# Altium PCB Smart Motor Switch.PcbDoc
Units mil, origin at the board's own origin, x right, y up, seen from the top; angles counter-clockwise.
Board outline 2795 x 1910 mil, 4 copper layers (Top Layer, Signal Layer 1, Mid-2, Bottom Layer), stack 30.634 mil thick; 53 components, 33 nets, 256 pads, 81 vias.
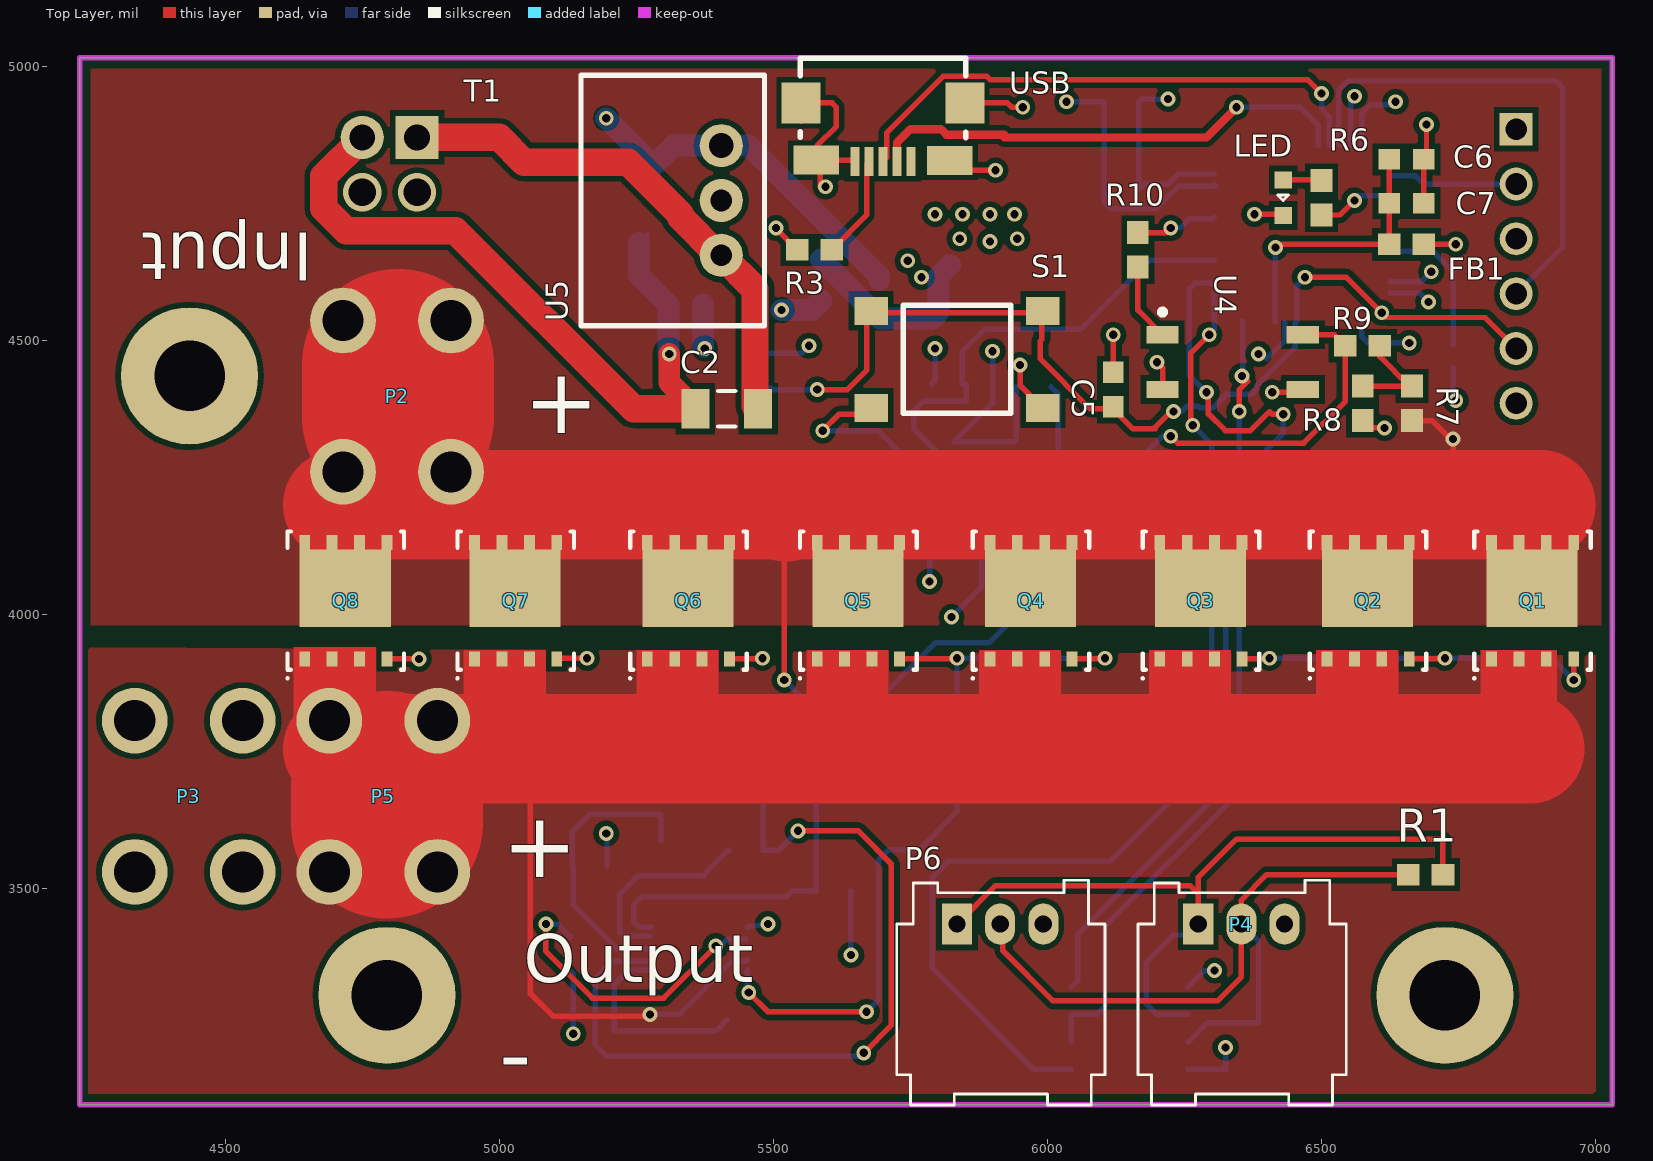
[diagram p0: Top Layer view]
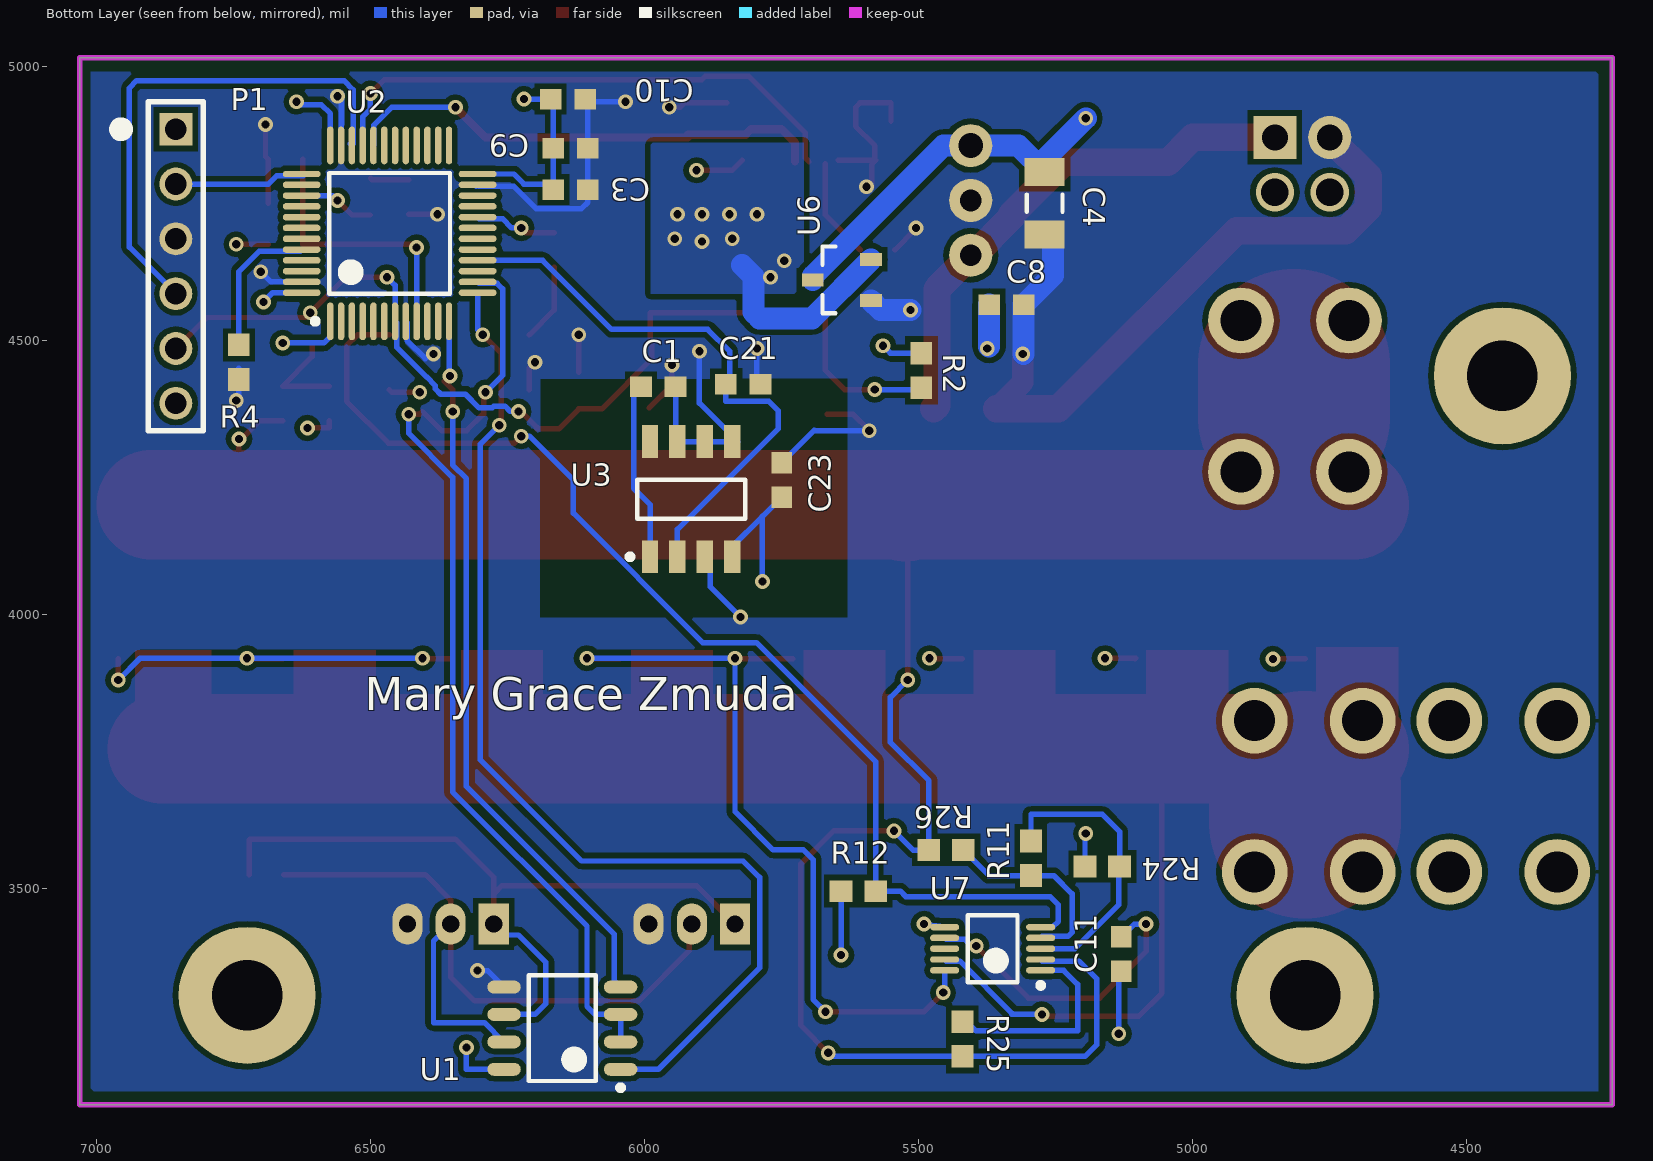
[diagram p1: Bottom Layer view, seen from below]
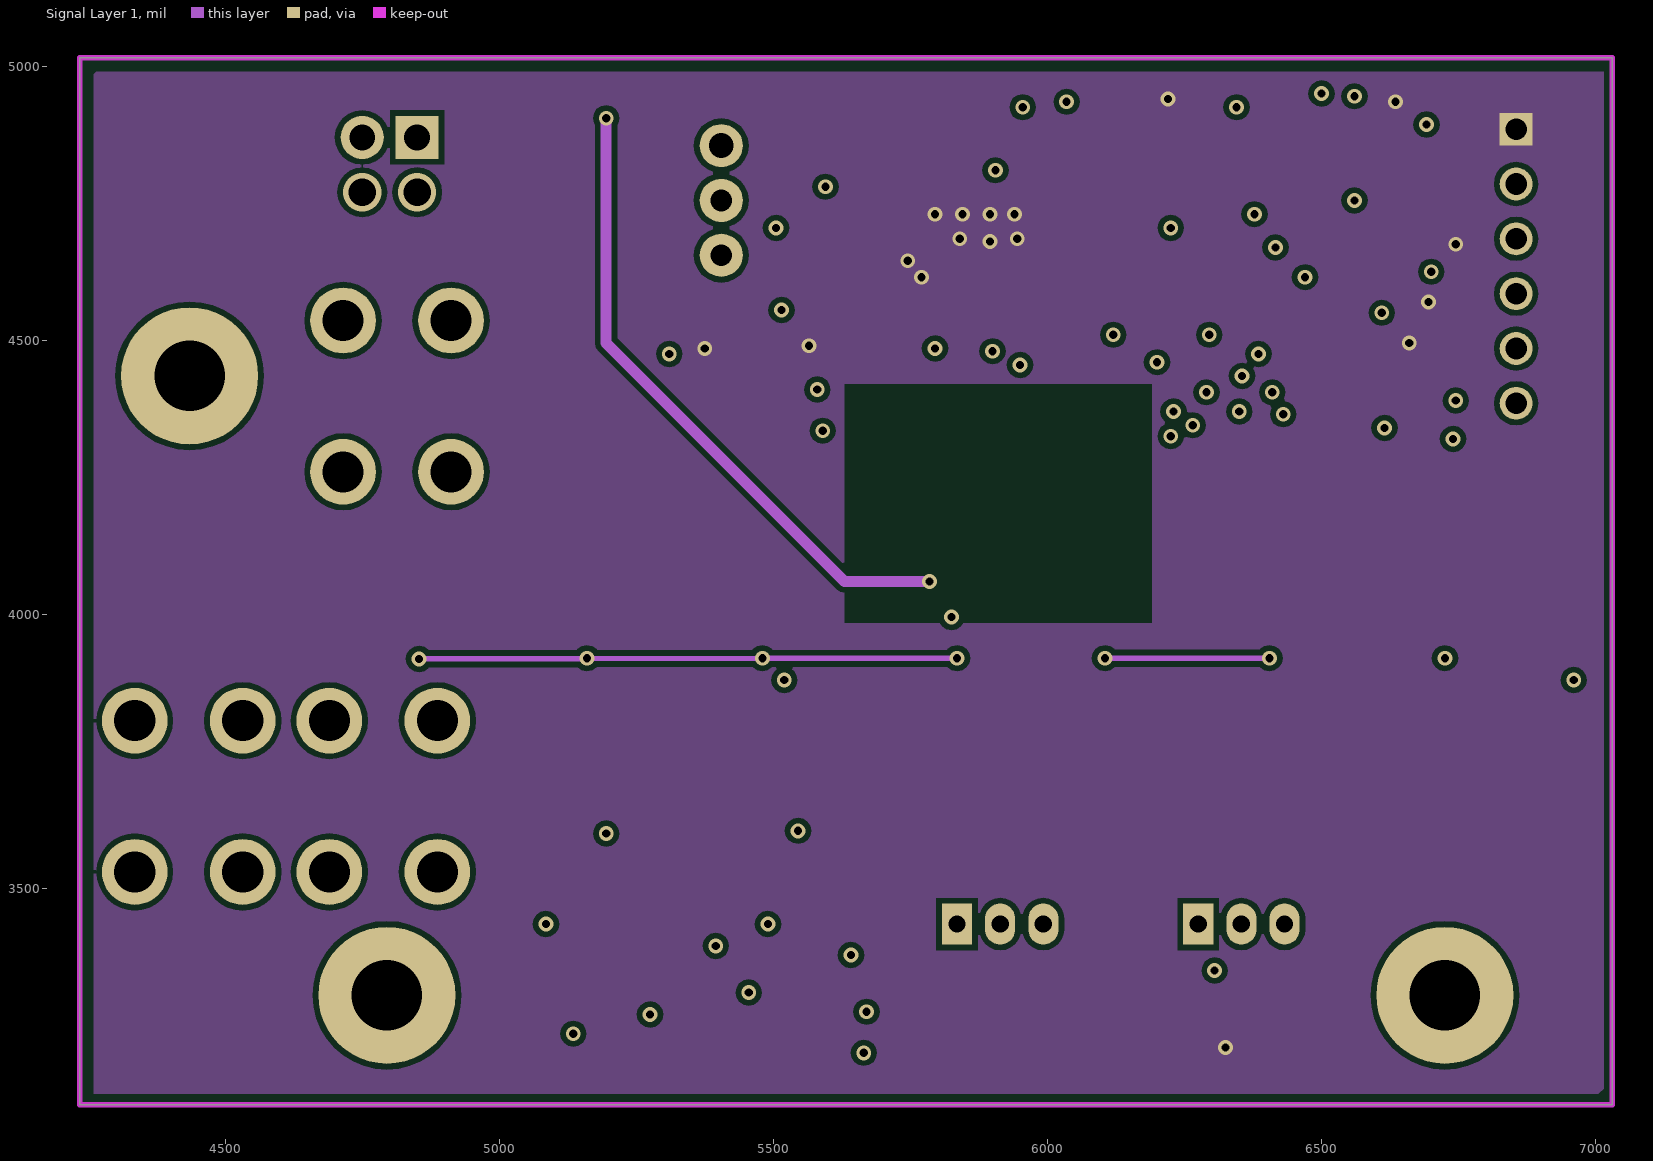
[diagram p2: Signal Layer 1]
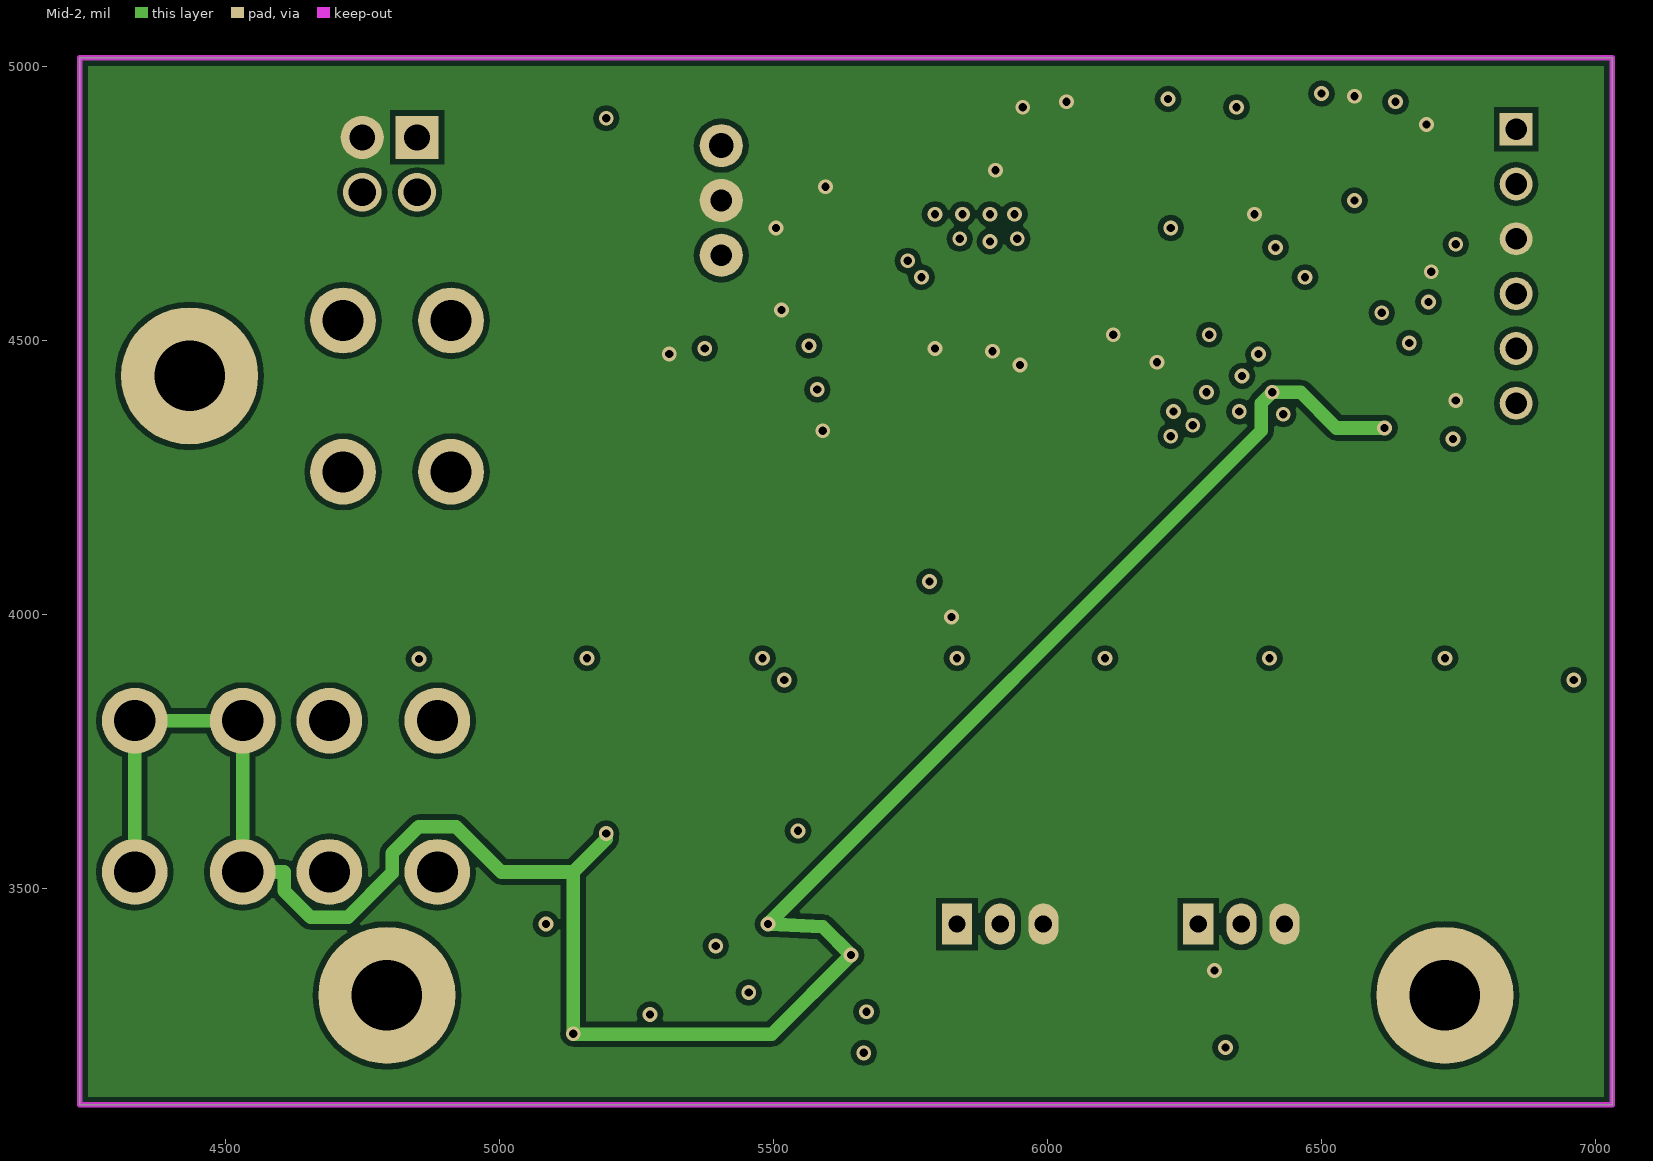
[diagram p3: Mid-2]

## Layer stack, top to bottom
Top Solder: solder mask 0.4, Solder Resist, Dk 3.5
Top Layer: signal copper 1.4
Dielectric 1: core 10, FR-4, Dk 4.2
Signal Layer 1: signal copper 1.417
Dielectric 3: prepreg 5, Dk 4.2
Mid-2: signal copper 1.417
Dielectric 2: core 10, Dk 4.2
Bottom Layer: signal copper 1.4
Bottom Solder: solder mask 0.4, Solder Resist, Dk 3.5

## Board outline
4235,3105 7030,3105 7030,5015 4235,5015

## Design rules (kind name [scope] priority, off if disabled: settings)
Clearance [All] p1: gap=10 except(6: Track-Track Track-SMDPad SMDPad-SMDPad)
DiffPairsRouting [All] p1: maxlimit=10 minlimit=10 mostfreqgap=10 toplayer_minwidth=10 toplayer_maxwidth=15 toplayer_prefwidth=10 midlayer1_minwidth=10 midlayer1_maxwidth=15 midlayer1_prefwidth=10 midlayer2_minwidth=10 midlayer2_maxwidth=15 midlayer2_prefwidth=10 bottomlayer_minwidth=10 bottomlayer_maxwidth=15 bottomlayer_prefwidth=10 maxuncoupledlength=500
HoleSize [All] p1: absolutevalues=TRUE maxlimit=150 minlimit=1 maxpercent=80.000 minpercent=20.000
MinimumSolderMaskSliver [All] p1: minsoldermaskwidth=1
PolygonConnect [All] p1: connectstyle=Direct reliefconductorwidth=10 reliefentries=4 polygonreliefangle="90 Angle" airgapwidth=10
RoutingVias [All] p1: holewidth=28 width=50 viastyle="Through Hole" minholewidth=28 minwidth=50 maxholewidth=28 maxwidth=50
SilkToSolderMaskClearance [IsPad] p1: minsilkscreentomaskgap=2 clearancetoexposedcopper=TRUE
SolderMaskExpansion [All] p1: expansion=4
Width [All] p1: maxlimit=350 minlimit=10 preferedwidth=10
26 further rules are at their usual default settings.

## Classes and differential pairs
component class CPU: C1 C3 C5 C6 C7 C9 C10 C11 C21 C23 FB1 LED P1 P2 P3 P4 P5 P6 Q1 Q2 Q3 Q4 Q5 Q6 Q7 Q8 R1 R2 R3 R4 R6 R7 R8 R9 R10 R11 R12 R24 R25 R26 S1 T1 U1 U2 U3 U4 U7 USB
component class power: C2 C4 C8 U5 U6
differential pair USB: +USB_P -USB_N

## Components (designator, comment, footprint, x,y, rotation, side; value= is the part's Value field where it differs from the comment)
C1 "Cap" CAPC0603 5975,4415 r0 bottom
C2 "Cap" CAPC1206 5415,4375 r180 top
C3 "Cap" CAPC0603 6135,4775 r180 bottom
C4 "Cap" CAPC1206 5270,4750 r270 bottom
C5 "Cap" CAPC0603 6120,4410 r90 top
C6 "Cap" CAPC0603 6655,4830 r0 top
C7 "Cap" CAPC0603 6655,4750 r0 top
C8 "Cap" CAPC0603 5340,4565 r180 bottom
C9 "Cap" CAPC0603 6135,4850 r180 bottom
C10 "Cap" CAPC0603 6140,4940 r180 bottom
C11 "Cap" CAPC0603 5130,3380 r270 bottom
C21 "Cap" CAPC0603 5820,4420 r180 bottom
C23 "Cap" CAPC0603 5750,4245 r90 bottom
FB1 "FBead" RES0603 6655,4675 r0 top
LED "LED" LED0603 6430,4760 r270 top
P1 "SWD" SWD_STM32 6855,4885 r180 bottom
P2 "SCREW TERM VERT PCMNT" "SCREW TERM SINGLE VERT" 4715,4260 r0 top
P3 "SCREW TERM VERT PCMNT" "SCREW TERM SINGLE VERT" 4335,3530 r0 top
P4 "3pos RA sherlock connector" MOLEX-HDR-1X3-SHERLOCK-RA 6275,3435 r180 top
P5 "SCREW TERM VERT PCMNT" "SCREW TERM SINGLE VERT" 4690,3530 r0 top
P6 "3pos RA sherlock connector" MOLEX-HDR-1X3-SHERLOCK-RA 5835,3435 r180 top
Q1 "CSD19502Q5B" CSD19502Q5B 6885,4025 r90 top
Q2 "CSD19502Q5B" CSD19502Q5B 6585,4025 r90 top
Q3 "CSD19502Q5B" CSD19502Q5B 6280,4025 r90 top
Q4 "CSD19502Q5B" CSD19502Q5B 5970,4025 r90 top
Q5 "CSD19502Q5B" CSD19502Q5B 5655,4025 r90 top
Q6 "CSD19502Q5B" CSD19502Q5B 5345,4025 r90 top
Q7 "CSD19502Q5B" CSD19502Q5B 5030,4025 r90 top
Q8 "CSD19502Q5B" CSD19502Q5B 4720,4025 r90 top
R1 "Res" RES0603 6690,3525 r0 top
R2 "Res" RES0603 5495,4445 r270 bottom
R3 "Res" RES0603 5575,4665 r180 top
R4 "Res" RES0603 6740,4460 r90 bottom
R6 "Res" RES0603 6500,4760 r90 top
R7 "Res" RES0603 6665,4385 r90 top
R8 "Res" RES0603 6575,4385 r270 top
R9 "Res" RES0603 6575,4490 r180 top
R10 "Res" RES0603 6165,4665 r270 top
R11 "Res" RES0603 5295,3555 r90 bottom
R12 "Res" RES0603 5610,3495 r180 bottom
R24 "Res" RES0603 5165,3540 r0 bottom
R25 "Res" RES0603 5420,3225 r90 bottom
R26 "Res" RES0603 5450,3570 r180 bottom
S1 "Button" PTS645xxxxSMTR92 5835,4465 r180 top
T1 "1725656" 1725656 4850,4870 r270 top
U1 "SP3485" SP3485 6150,3245 r0 bottom
U2 "STM32F072CB" STM32F072CB 6465,4695 r90 bottom
U3 "FHS 40-P/SP600" "FHS 40-P/SP600" 5915,4210 r90 bottom
U4 "LTV-356T" LTV-356T 6210,4510 r270 top
U5 "R-78C5.0-1.0" R-78C5.0-1.0 5405,4655 r90 top
U6 "MCP1703AT" MCP1703AT-xx02EDB 5640,4610 r0 bottom
U7 "LM5060" LM5060 5365,3390 r0 bottom
USB "USB Micro" 10118192-0001LF 5700,4805 r180 top

## Footprints (in the part's own frame and the unit in brackets; to place one, negate y for a bottom-side part, rotate by r counter-clockwise, add the part's x,y. Pads: shape width x height; smd on the part's side, far side on the other; paste and mask are expansions set on the pad)
1725656 [mm] "CONN TERM BLOCK 2.54MM 2POS"
  rect 2x2 hole 1.2: 1(0,0)
  round 2 hole 1.2: 2(0,-2.54)
10118192-0001LF [mm] "USB Micro-B Recepticle"
  rect 0.4x1.35 smd: 1(-1.3,-0.533) 2(-0.65,-0.533) 3(0,-0.533) 4(0.65,-0.533) 5(1.3,-0.533)
  rect 1.8x1.9 smd: SHD(-3.8,-3.248) SHD(3.8,-3.248)
  rect 2.1x1.35 smd: SHD(-3.1,-0.584) SHD(3.1,-0.598)
  silkscreen extent -3.83,-5.33 3.83,-1.63, body extent -3.96,-5.98 3.96,-0.32, height 3.09
CAPC0603 [mm] "Chip Capacitor, 2-Leads, Body 1.60x0.80mm, IPC Medium Density"
  rect 1x0.95 smd: 1(-0.8,0) 2(0.8,0)
  body extent -0.88,-0.48 0.87,0.48, height 0.8
CAPC1206 [mm] "Chip Capacitor, 2-Leads, Body 3.20x1.60mm, IPC Medium Density"
  rect 1.3x1.85 smd: 1(-1.45,0) 2(1.45,0)
  silkscreen extent -0.4,-0.82 0.4,0.82, body extent -1.7,-0.9 1.7,0.9, height 1.8
CSD19502Q5B [mm] "PSON, 8-Leads, Body 5.00x6.00mm, Pitch 1.27mm, Thermal Pad 4.22x3.58mm, IPC Medium Density"
  rect 3.58x4.22 smd paste-1.79 mask+0: D(0.575,0.025)
  rect 0.7x0.5 smd mask+0: D(2.7,-1.905) D(2.7,-0.635) D(2.7,0.635) D(2.7,1.905) G(-2.7,-1.905) S(-2.7,-0.635) S(-2.7,0.635) S(-2.7,1.905)
  silkscreen extent -3.65,-2.7 3.2,2.75, body extent -3.05,-2.55 3.05,2.55, height 1.05
"FHS 40-P/SP600" [mm] "SENSOR CURRENT 100A 5V BI 8SOIC"
  rect 1.52x0.76 smd: 1(-2.67,1.905) 2(-2.67,0.635) 3(-2.67,-0.635) 4(-2.67,-1.905) 5(2.67,-1.905) 6(2.67,-0.635) 7(2.67,0.635) 8(2.67,1.905)
  silkscreen extent -2.79,-2.5 0.9,2.96, body extent -2,-2.5 2,2.5, height 1.72
LED0603 [mm] "Chip LED, 2-Leads, Body 1.60x0.80mm, IPC Medium Density"
  rect 0.8x0.8 smd: A(-0.825,0) C(0.825,0)
  silkscreen extent -0.13,-0.25 0.12,0.25, body extent -0.88,-0.48 0.87,0.47, height 0.8
LM5060 [mm] "10-VSSOP"
  oval 1.35x0.3 smd: 1(-2.225,1) 2(-2.225,0.5) 3(-2.225,0) 4(-2.225,-0.5) 5(-2.225,-1) 6(2.225,-1) 7(2.225,-0.5) 8(2.225,0) 9(2.225,0.5) 10(2.225,1)
  silkscreen extent -2.35,-1.55 1.15,1.82, body extent -1.55,-1.55 1.55,1.55, height 1.1
LTV-356T [mm] "OPTOISOLATOR 3.75KV TRANS 4-SOP"
  rect 0.8x1.5 smd: 1(0,0) 2(2.54,0) 3(2.54,6.5) 4(0,6.5)
  silkscreen extent -1.17,-0.12 -0.93,0.13
MCP1703AT-xx02EDB [mm] "SOT23, 3-Leads, Body 2.90x2.55mm, Pitch 0.95mm, IPC Medium Density"
  rect 1x0.6 smd: 1(-1.35,0.95) 2(-1.35,-0.95) 3(1.35,0)
  silkscreen extent 0.3,-1.55 0.9,1.55, body extent -0.9,-1.55 0.9,1.55, height 1.45
MOLEX-HDR-1X3-SHERLOCK-RA [mm]
  rect 1.397x1.905 hole 0.8: 1(0,0)
  oval 1.397x1.905 hole 0.8: 2(-2,0) 3(-4,0)
  silkscreen extent -6.86,-2.03 2.79,8.38, body extent -6.88,-1.99 2.82,8.51, height 5.75
PTS645xxxxSMTR92 [mm] "PTS645 Series SMT 6 mm Tactile Switch"
  rect 1.555x1.3 smd: A(-3.975,2.25) A(3.975,2.25) B(-3.975,-2.25) B(3.975,-2.25)
  silkscreen extent -2.5,-2.5 2.5,2.5, body extent -3,-3 3,3, height 4.5
R-78C5.0-1.0 [mm] "CONV DC/DC 1A 5V OUT SIP VERT"
  round 2 hole 1: 1(0,0) 2(2.54,0)
  round 2 hole 1.15: 3(5.08,0)
  silkscreen extent -3.26,-2 8.34,6.5, body extent -3.2,-1.9 8.3,6.5, height 10.8
RES0603 [mm] "Chip Resistor, 2-Leads, Body 1.60x0.80mm, IPC Medium Density"
  rect 1.05x1 smd: 1(-0.8,0) 2(0.8,0)
  body extent -0.88,-0.48 0.87,0.47, height 0.8
"SCREW TERM SINGLE VERT" [mil] "Keystone Electronics 7701 - TERM W/ASSEMBLD SCREW VERT PCMNT"
  round 120 hole 75: 0(0,0) 0(0,276) 0(197,0) 0(197,276)
  body extent -53,-14 257,296, height 322
SP3485 [mm] "SOIC, 8-Leads, Body 4.90x3.90mm, Pitch 1.27mm, IPC Medium Density"
  oval 1.55x0.6 smd: 1(-2.7,1.905) 2(-2.7,0.635) 3(-2.7,-0.635) 4(-2.7,-1.905) 5(2.7,-1.905) 6(2.7,-0.635) 7(2.7,0.635) 8(2.7,1.905)
  silkscreen extent -2.82,-2.45 1.55,2.88, body extent -1.95,-2.45 1.95,2.45, height 1.75
STM32F072CB [mm] "TSQFP, 48-Leads, Body 7.00x7.00mm, Pitch 0.50mm, IPC Medium Density"
  oval 1.75x0.3 smd: 1(-4.075,2.75) 2(-4.075,2.25) 3(-4.075,1.75) 4(-4.075,1.25) 5(-4.075,0.75) 6(-4.075,0.25) 7(-4.075,-0.25) 8(-4.075,-0.75) 9(-4.075,-1.25) 10(-4.075,-1.75) 11(-4.075,-2.25) 12(-4.075,-2.75) 25(4.075,-2.75) 26(4.075,-2.25) 27(4.075,-1.75) 28(4.075,-1.25) 29(4.075,-0.75) 30(4.075,-0.25) 31(4.075,0.25) 32(4.075,0.75) 33(4.075,1.25) 34(4.075,1.75) 35(4.075,2.25) 36(4.075,2.75)
  oval 0.3x1.75 smd: 13(-2.75,-4.075) 14(-2.25,-4.075) 15(-1.75,-4.075) 16(-1.25,-4.075) 17(-0.75,-4.075) 18(-0.25,-4.075) 19(0.25,-4.075) 20(0.75,-4.075) 21(1.25,-4.075) 22(1.75,-4.075) 23(2.25,-4.075) 24(2.75,-4.075) 37(2.75,4.075) 38(2.25,4.075) 39(1.75,4.075) 40(1.25,4.075) 41(0.75,4.075) 42(0.25,4.075) 43(-0.25,4.075) 44(-0.75,4.075) 45(-1.25,4.075) 46(-1.75,4.075) 47(-2.25,4.075) 48(-2.75,4.075)
  silkscreen extent -4.2,-2.8 2.8,3.58, body extent -3.5,-3.5 3.5,3.5, height 1.6
SWD_STM32 [mil] "SWD connector matching the pinout on STM Discovery Boards"
  rect 60x60 hole 39.37: 1(0,0)
  round 60 hole 39.37: 2(0,-100) 3(0,-200) 4(0,-300) 5(0,-400) 6(0,-500)
  silkscreen extent -110,-550 50,50

## Part data
FB1: "Ferrite Bead"
P1: library part SWD_STM32, "SWD connector matching the pinout on STM Discovery Boards"
P2 P3 P5: "Keystone Electronics 7701"
P4 P6: library part MOLEX-HDR-1x3-SHERLOCK_RA, "Header, Molex, 2mm Pitch Sherlock Header, Single Row, Right Angle 3 Circuits, Length 3.3mm"
Q1 Q2 Q3 Q4 Q5 Q6 Q7 Q8: "NEXFET Power MOSFET"
S1: "SPST Button"
T1: "CONN TERM BLOCK 2.54MM 2POS"
U1: "IC TXRX RS485 HALF DUPLEX 8NSOIC"
U2: "MCU 32BIT 128KB FLASH 48LQFP"
U4: "OPTOISOLATOR 3.75KV TRANS 4-SOP"
U5: "CONV DC/DC 1A 5V OUT SIP VERT"
U6: "250 mA, 16V, Low Quiescent Current LDO Regulator"
U7: "Hotswap Controller"
USB: "USB Mini B Metal Shield SMT"

## Free pads (board coordinates)
  round 250 hole 128.5: 0(4795,3305) 1(4435,4435) 2(6725,3305)

## Via types
v1: diameter 27, hole 15, Top Layer to Bottom Layer, tented both sides, 78 vias
v2: diameter 70, hole 50, Top Layer to Bottom Layer, tented both sides, 2 vias
v3: diameter 27, hole 15, Top Layer to Bottom Layer, 1 vias

## Nets (pads, with @x,y where several pads share a name; then routed paths per layer and width w, separated by ;. In a path a pad name is that pad's centre, name@x,y a point inside that pad or via, vN(x,y) a via of type N, cw(c..) or ccw(c..) an arc to the next point about the centre after c; other vN are vias at no path point)
3V3: C3.1 C8.1 C9.1 C10.1 FB1.2 P1.1 R2.1 U1.8 U2.1 U2.24 U2.36 U2.48 U6.2 | length 1373.1
  Top Layer w10: FB1.2 v1(6745,4675)
  Bottom Layer w10: v1@5371.5,4488.5 v1(5375,4485) ; R2.1 5551.5,4476.5 v1(5565,4490) ; v1(6220,4940) C10.1 6166.5,4935 C9.1 C3.1 6176.5,4785 6220,4785 6238.27,4803.27 U2.24 ; U1.8 6325,3170 v1(6325,3210) ; U2.1@6573.27,4535 6573.27,4506.73 6585,4495 v1(6660,4495) ; U2.36 6573.27,4913.27 6590,4930 6630,4930 v1(6635,4935) ; U2.48 6678.27,4586.73 v1(6695,4570)
  Bottom Layer w40: v1@5371.5,4488.5 C8.1 ; U6.2 5694.25,4540 5790,4540 5801.5,4551.5 5801.5,4616.52 5822.49,4637.51
  other v1: 5770,4615 5745,4645 5895,4680 5840,4685 5945,4685 5795,4730 5845,4730 5895,4730 5940,4730
5V: C4.1 C23.1 U3.4 U5.3 U6.3 | length 2122.1
  Signal Layer 1 w20: v1(5195,4905) 5195,4495 5630,4060 v1(5785,4060)
  Bottom Layer w10: C23.1 5785,4178.5 ; v1(5785,4060) 5785,4178.5 ; U3.4 5840,4123.5 5785,4178.5
  Bottom Layer w40: v1(5195,4905) 5270,4830 C4.1 5317.91,4855 U5.3 5455,4855 5693.15,4616.85 U6.3
24GND: C1.1 C2.2 C3.2 C4.2 C5.2 C6.2 C7.2 C8.2 C9.2 C10.2 C21.2 C23.2 LED.C P1.3 P4.3 P6.3 R3.2 R4.1 S1.A T1.2 U1.5 U2.8 U2.23 U2.35 U2.47 U3.3 U3.5 U3.6 U3.7 U4.2 U5.2 U6.1 USB.5 USB.SHD | length 4195.1
  Top Layer w10: v1(5505,4705) 5505,4703.5 R3.2 ; USB.SHD@5550.39,4899.61 5550.39,4932.89 5607.11,4932.89 5615,4925 5615,4890 5580,4855 USB.SHD@5580,4830.61 ; v1(5590,4335) 5620,4365 S1.A@5667.09,4365 ; v1(5595,4780) 5585.91,4780 5585.91,4820.61 5577.95,4828.56 USB.5@5646.26,4828.56 ; USB.SHD@5822.05,4828 5840.05,4810 v1(5905,4810) ; USB.SHD@5849.61,4932.89 5927.11,4932.89 5935,4925 v1(5955,4925) ; v1(5950,4455) 5950,4417.91 S1.A@5991.5,4376.42 ; C5.2 v1(6120,4510) ; v3(6200,4460) 6210,4450 U4.2 ; v1(6377.52,4730) LED.C@6430,4730 ; C7.2 C6.2 6691.5,4835 v1(6691.5,4893.5)
  Top Layer w40: v1(5310,4475) 5310,4422.91 C2.2
  Top Layer w50: T1.2@4750.5,4869.5 4680,4798.99 4680,4741.01 4721.01,4700 4920,4700 5245,4375 C2.2
  Mid-2 w25: v1@6384,4474 v1(6385,4475)
  Bottom Layer w10: C4.2@5255,4677.91 C4.2 ; v1(5590,4335) 5690.75,4335 ; 5690.75,4335.75 C23.2 ; C21.2 5795,4426.5 v1(5795,4485) ; v1(5825,3995) 5880,4050 5880,4094.88 U3.3 ; v1(5900,4480) 5900,4385.24 5829.88,4315.12 U3.5 U3.6 U3.7 ; U3.7@5943.5,4318.62 C1.1 ; v1(6035,4935) 6103.5,4935 C9.2 C3.2 6103.5,4751.74 6115.25,4740 6197.63,4740 6238.43,4780.8 U2.23@6301.79,4780.8 ; U1.5 6286.3,3350 v1(6305,3350) ; U2.23 U2.23@6307.35,4780.8 ; v1(6385,4475) 6385,4481.33 6400,4466.33 6432.69,4499.02 U2.8@6432.69,4531.79 ; U2.35 6553.58,4938.58 v1(6560,4945) ; U2.47 6681.42,4606.42 v1(6700,4625) ; v1@6740,4395 R4.1@6740,4448.5
  Bottom Layer w40: C4.2@5255,4677.91 5255,4618.5 C8.2 v1@5308.5,4475 ; v1(5515,4555) 5569.25,4555 U6.1
  other v1: 6745,4390
24V: C2.1 T1.1 U5.1 | length 954.9
  Top Layer w50: T1.1 5000,4870 5045,4825 5235,4825 5330.63,4729.37 5330.63,4724.19 5399.82,4655 U5.1 5466.5,4593.5 5466.5,4380.59 C2.1
48GND: C11.2 P3.0 R8.2 R12.1 R24.2 U4.3 U7.6 | length 4684.1
  Top Layer w10: v1(6410,4405) 6460.91,4405 U4.3 ; R8.2 6575,4340 v1(6615,4340)
  Mid-2 w25: P3.0@4335,3530 4335,3806 4532,3806 4532,3530 4607.5,3530 4607.5,3495.83 4655.83,3447.5 4724.17,3447.5 4804.5,3527.83 4804.5,3564.17 4852.83,3612.5 4921.17,3612.5 5003.67,3530 5135,3530 ; v1(5195,3600) 5195,3590 5135,3530 ; v1(6615,4340) 6527,4340 6462,4405 v1(6410,4405) 6390,4385 6390,4335 v1(5490,3435) 5590,3430 v1(5641.5,3378.5) 5496.99,3234 5136,3234 v1(5135,3235) 5135,3530
  Bottom Layer w10: C11.2 5135,3343.5 v1(5135,3235) ; R24.2 v1@5196.5,3600 ; U7.6 5453.23,3430 v1(5490,3435) ; v1(5641.5,3378.5) R12.1
48VIN: P2.0 Q1.D Q2.D Q3.D Q4.D Q5.D Q6.D Q7.D Q8.D R7.1 R25.1 R26.1 U7.2 | length 4783.6
  Top Layer w10: 5473.67,4279.98 5520,4233.65 5520,4200 v1(5520,3880) ; v1(5545,3605) 5655,3605 5715,3545 5715,3250 v1(5665,3200) ; R7.1@6660,4353.5 6701.5,4353.5 6735,4320 v1(6740,4320) 6740,4205
  Top Layer w40: P2.0@4912,4511 P2.0@4926,4525 ; 5473.67,4241.33 5473.67,4279.98 5475,4200
  Top Layer w200: 4705,4200 5475,4200 5520,4200 5523.5,4196.5 5527,4200 6510,4200 6900,4200
  Top Layer w350: 4815,4360 4815,4455
  Bottom Layer w10: U7.2 5274.62,3367.54 5207.54,3367.54 5175,3335 5175,3215 5196.5,3193.5 R25.1@5415,3193.5 ; R25.1 5658.5,3193.5 v1(5665,3200) ; v1(5520,3880) 5551.5,3848.5 5551.5,3766.5 5481.5,3696.5 R26.1 5510,3570 v1(5545,3605)
48VOUT: P5.0 Q1.S Q2.S Q3.S Q4.S Q5.S Q6.S Q7.S Q8.S U7.9 | length 3135.6
  Top Layer w10: 4755,3695 4755,3750 ; 5056.5,3690 5056.5,3388.5 5056.5,3308.5 5098.5,3266.5 5271.5,3266.5 v1(5275,3270)
  Top Layer w200: P5.0@4705,3755 6880,3755
  Top Layer w350: 4795,3620 4795,3685
  Bottom Layer w10: v1(5275,3270) 5330,3270 5328.7,3271.3 5424.93,3367.54 5449.82,3367.54 U7.9
A: P4.1 P6.1 R1.2 U1.6 | length 1393
  Top Layer w10: P6.1@5840,3415 5840,3440 5905,3505 6260,3505 6275,3490 ; P4.1 6275,3520 6345,3590 6720,3590 6721.5,3588.5 R1.2
  Bottom Layer w10: U1.6 6200,3270 6180,3290 6180,3365 6230,3415 P4.1@6275,3415
B: P4.2 P6.2 R1.1 U1.7 | length 1318.5
  Top Layer w10: P6.2@5918.74,3415 5918.74,3386.26 6010,3295 6310,3295 6353.74,3338.74 6353.74,3478.74 6400,3525 R1.1
  Bottom Layer w10: U1.7 6257.26,3220 6292.26,3255 6385,3255 6385,3403.74 6368.74,3420 P4.2@6348.74,3420
DE/RE: U1.2 U1.3 U2.14 | length 1791.3
  Top Layer w10: v1(6290,4405) 6293.5,4401.5 6293.5,4365 6294.69,4365 6324.69,4335 6370.31,4335 6405.31,4370 6410.31,4365 v1(6430,4365)
  Bottom Layer w10: U1.2 U1.3 6090,3270 6105,3285 6105,3431.21 6350,3676.21 6350,4250 6430,4330 v1(6430,4365) ; v1(6290,4405) 6259.12,4435.88 6259.12,4593.73 6269.02,4603.64 6301.79,4603.64 U2.14
ENABLE: R9.2 R12.2 U4.4 U7.5 | length 2117.4
  Top Layer w10: v1(6225,4325) 6237.65,4312.35 6467.35,4312.35 6543.5,4388.5 R9.2 6523.5,4510 U4.4
  Bottom Layer w10: U7.5 5255.63,3429.37 5245,3440 5245,3470 5260,3485 5523.5,3485 5533.5,3495 R12.2 5578.5,3731.13 5795.87,3948.5 5894.06,3948.5 6130,4184.44 6130,4245 6210,4325 v1(6225,4325)
IN: R10.1 U2.20 | length 151.2
  Top Layer w10: R10.1 6216.5,4696.5 v1(6225,4705)
  Bottom Layer w10: v1(6225,4705) 6242.37,4705 6259.12,4721.75 6301.79,4721.75 U2.20
LED: R6.1 U2.39 | length 140.1
  Top Layer w10: R6.1 6533.5,4728.5 v1(6560,4755)
  Bottom Layer w10: v1(6560,4755) 6568.9,4763.9 U2.39
MOT_I: C21.1 U2.16 U3.2 | length 1064.8
  Bottom Layer w10: C21.1@5845,4420 5845,4480 5885,4520 6060,4520 6185.79,4645.79 U2.16 ; C21.1 5851.5,4388.5 5773.19,4388.5 5756.5,4371.81 5756.5,4338.18 5820.48,4274.2 5820.8,4274.2 5940,4155 U3.2
NetC1_2: C1.2 U3.1 | length 328.1
  Bottom Layer w10: U3.1 5990,4200 6020,4230 6020,4401.5 C1.2
NetC6_1: C6.1 C7.1 FB1.1 U2.9 | length 504
  Top Layer w10: v1(6415.79,4669.21) 6415.79,4666.21 6424.57,4675 FB1.1 C7.1 C6.1
  Bottom Layer w10: U2.9 v1(6415.79,4669.21)
NetC11_1: C11.1 U7.7 | length 549
  Top Layer w10: v1(5085,3435) 5085,3385 5170,3300 5300,3300 v1(5395,3395)
  Bottom Layer w10: v1(5085,3435) 5106.5,3435 C11.1 ; v1(5395,3395) 5403.12,3395 5415.02,3406.91 U7.7@5449.82,3406.91
NetLED_A: LED.A R6.2 | length 71.2
  Top Layer w10: LED.A 6496.87,4792.48 R6.2@6499.9,4795.51
NetQ1_G: Q1.G Q2.G Q3.G Q4.G Q5.G Q6.G Q7.G Q8.G U7.10 | length 3638.6
  Top Layer w10: Q8.G v1(4853.7,3918.7) ; Q7.G 5103.7,3920 v1(5160,3920) ; Q6.G v1@5478.7,3918.7 ; v1(5455,3310) 5490,3275 v1(5670,3275) ; Q5.G v1@5833.7,3918.7 ; Q4.G v1@6103.7,3918.7 ; Q3.G v1@6413.7,3918.7 ; Q2.G v1@6723.7,3918.7 ; v1(6960,3880) Q1.G
  Signal Layer 1 w10: v1(4853.7,3918.7) 5160,3919.11 5480,3919.53 v1(5835,3920) ; v1(6105,3920) v1(6405,3920)
  Bottom Layer w10: U7.10 5452.6,3312.4 v1(5455,3310) ; v1(5670,3275) 5692.5,3297.5 5692.5,3552.5 5710.31,3570.3 5765.31,3570.3 5835,3640 v1(5835,3920) v1(6105,3920) ; v1(6405,3920) v1(6725,3920) 6920,3920 v1(6960,3880)
  other v1: 5480,3920
NetR3_1: R3.1 USB.4 | length 182.9
  Top Layer w10: R3.1 5670,4728.5 USB.4@5670,4821.59
NetR4_2: R4.2 U2.44 | length 261.1
  Bottom Layer w10: U2.44@6628.21,4662.69 6702.61,4662.69 6740,4625.31 R4.2
NetR7_2: R7.2 R8.1 R9.1 | length 180.7
  Top Layer w10: R8.1 6660,4416.5 6606.5,4470 R9.1
NetR10_2: R10.2 U4.1 | length 142.1
  Top Layer w10: R10.2 6165,4555 U4.1
NetR11_1: R11.1 R26.2 U7.4 | length 359.4
  Bottom Layer w10: U7.4@5274.62,3412.46 5227.54,3412.46 5220,3420 5220,3490 5253.5,3523.5 R11.1 5372.01,3523.5 R26.2
NetR11_2: R11.2 R24.1 U7.3 | length 530.6
  Bottom Layer w10: R24.1 5133.5,3603.5 5165,3635 5295,3635 R11.2 ; R24.1@5135,3538.5 5135,3470 5215,3390 U7.3
NetR25_2: R25.2 U7.1 | length 377.4
  Bottom Layer w10: U7.1 5235.63,3350.63 5210,3325 5210,3240 5395,3240 R25.2@5415.75,3260.75
RSTN: C5.1 P1.5 R2.2 S1.B U2.7 | length 1844.9
  Top Layer w10: v1(5580,4410) 5635,4410 5670,4445 5670,4537.91 5682.09,4550 5990,4550 5990,4502.09 ; 5986.5,4498.58 5986.5,4466.55 6078.05,4375 C5.1@6116.5,4375 ; C5.1@6120,4375 6156.5,4338.5 6196.5,4338.5 6195,4340 6225,4370 v1(6230,4370) ; v1(6470,4615) 6545,4615 v1(6610,4550) 6618.5,4541.5 6798.5,4541.5 P1.5
  Bottom Layer w10: R2.2 5498.5,4410 v1(5580,4410) ; v1(6230,4370) 6245,4370 6255,4380 6274.69,4380 6278.19,4376.5 6301.81,4376.5 6326.81,4401.5 6371.81,4401.5 6381.5,4411.19 6381.5,4416.81 6398.19,4433.5 6398.5,4433.5 6452.38,4487.38 U2.7@6452.38,4531.79 ; U2.7 6455.16,4600.16 v1(6470,4615)
SWCLK: P1.2 U2.37 | length 242.7
  Bottom Layer w10: U2.37 6622.65,4800.49 6670.88,4800.49 6686.37,4785 P1.2
SWDIO: P1.4 U2.34 | length 938.9
  Bottom Layer w10: U2.34 6536.68,4858.21 6531.5,4858.21 6531.5,4956.81 6548.19,4973.5 6926.5,4973.5 6940,4960 6940,4670 P1.4
USARTRX: U1.1 U2.13 | length 1975
  Top Layer w10: v1@6261.5,4348.5 6261.5,4476.5 v1(6295,4510)
  Bottom Layer w10: U1.1 5975,3170 5790,3355 5790,3520 5820,3550 6115,3550 6300,3735 6300,4310 v1(6265,4345) ; v1(6295,4510) 6304.57,4519.57 U2.13
USARTTX: U1.4 U2.12 | length 1355.5
  Top Layer w10: v1(6350,4370) 6350,4410 6365,4425 v1(6355,4435)
  Bottom Layer w10: U1.4 6055,3331.3 6055,3416.3 6325,3686.3 6325,4247.63 6350,4272.63 v1(6350,4370) ; v1(6355,4435) 6356.5,4433.5 6356.5,4534.33 U2.12
USB_N: U2.32 USB.2 | length 890.2
  Top Layer w15: USB.2 5725.59,4860.59 5750,4885 5805.57,4885 5815.57,4875 5921.16,4875 ; 5921.16,4870 6290,4870 v1(6345,4925)
  Bottom Layer w10: v1(6345,4925) 6461.26,4925 6494.25,4892.01 U2.32@6494.25,4855.71
USB_P: U2.33 USB.3 | length 1004.5
  Top Layer w10: USB.3 5706.72,4832.72 5706.72,4878.39 5809.62,4981.29 5889.6,4981.29 5895.89,4975 6475,4975 v1(6500,4950)
  Bottom Layer w10: v1(6500,4950) 6500,4921.62 6514.21,4907.4 U2.33
pads on no net: P1.6 U2.2 U2.3 U2.4 U2.5 U2.6 U2.10 U2.11 U2.15 U2.17 U2.18 U2.19 U2.21 U2.22 U2.25 U2.26 U2.27 U2.28 U2.29 U2.30 U2.31 U2.38 U2.40 U2.41 U2.42 U2.43 U2.45 U2.46 U3.8 U7.8 USB.1
copper on no net:
  other v2: 4750,4770 4850,4770

## Polygon pours and split planes (outlines as drawn)
3V3 on Bottom Layer "Top Layer-No Net" (solid, pour order 5): 5710,4860 5710,4585 5988.82,4585 5988.82,4860
24GND on Bottom Layer "Top Layer-No Net" (solid, pour order 6): 4255,4990 4260,4985 4260,3130 7005,3130 7010,3135 7010,4990 4265,4990 4260,4985
3V3 on Signal Layer 1 "Top Layer-No Net" (solid, pour order 8): 4265,4990 4260,4985 4260,3125 7005,3125 7010,3130 7015,3135 7015,4990 4265,4990
24GND on Mid-2 "Top Layer-No Net" (solid, pour order 7): 4240,5010 4235,5005 4235,3105 7030,3105 7030,5015 4235,5015
48VOUT on Top Layer "48VOUT" (solid, pour order 13): 4255,3940 4250,3935 4250,3125 6995,3125 7000,3130 7000,3925
48VIN on Top Layer "48VIn" (solid, pour order 11): 4255,4995 4255,3980 7010,3980 7010,4995

## Keep-outs
Keep-Out Layer:
  the board outline again, w10

## Other copper
Top Layer:
  rectangle net 48VOUT: 4625,3805 4775,3940
  rectangle net 48VOUT: 4935,3795 5085,3935
  rectangle net 48VOUT: 5250,3795 5400,3935
  rectangle net 48VOUT: 5560,3790 5710,3935
  rectangle net 48VOUT: 5875,3795 6025,3935
  rectangle net 48VOUT: 6185,3775 6335,3935
  rectangle net 48VOUT: 6490,3770 6640,3935
  rectangle net 48VOUT: 6790,3775 6930,3935
Signal Layer 1:
  pour cut-out: 5630,4420 5630,3985 6190,3985 6190,4025 6190,4420
Bottom Layer:
  pour cut-out: 5630,4430 5630,3995 6190,3995 6190,4035 6190,4430

## Silkscreen, mask and mechanical layers (free items; w line width, h text height)
Top Overlay:
  text "Input" at 4660,4725 h150 r180
  text "+" at 5045,4330 h120
  text "+" at 5005,3520 h120
  text "Output" at 5045,3300 h150
  text "-" at 5000,3140 h120
Bottom Overlay:
  text "Mary Grace Zmuda" at 6510,3825 h60